# EAGLE board PSU+GainStage (EAGLE 7.6.0)
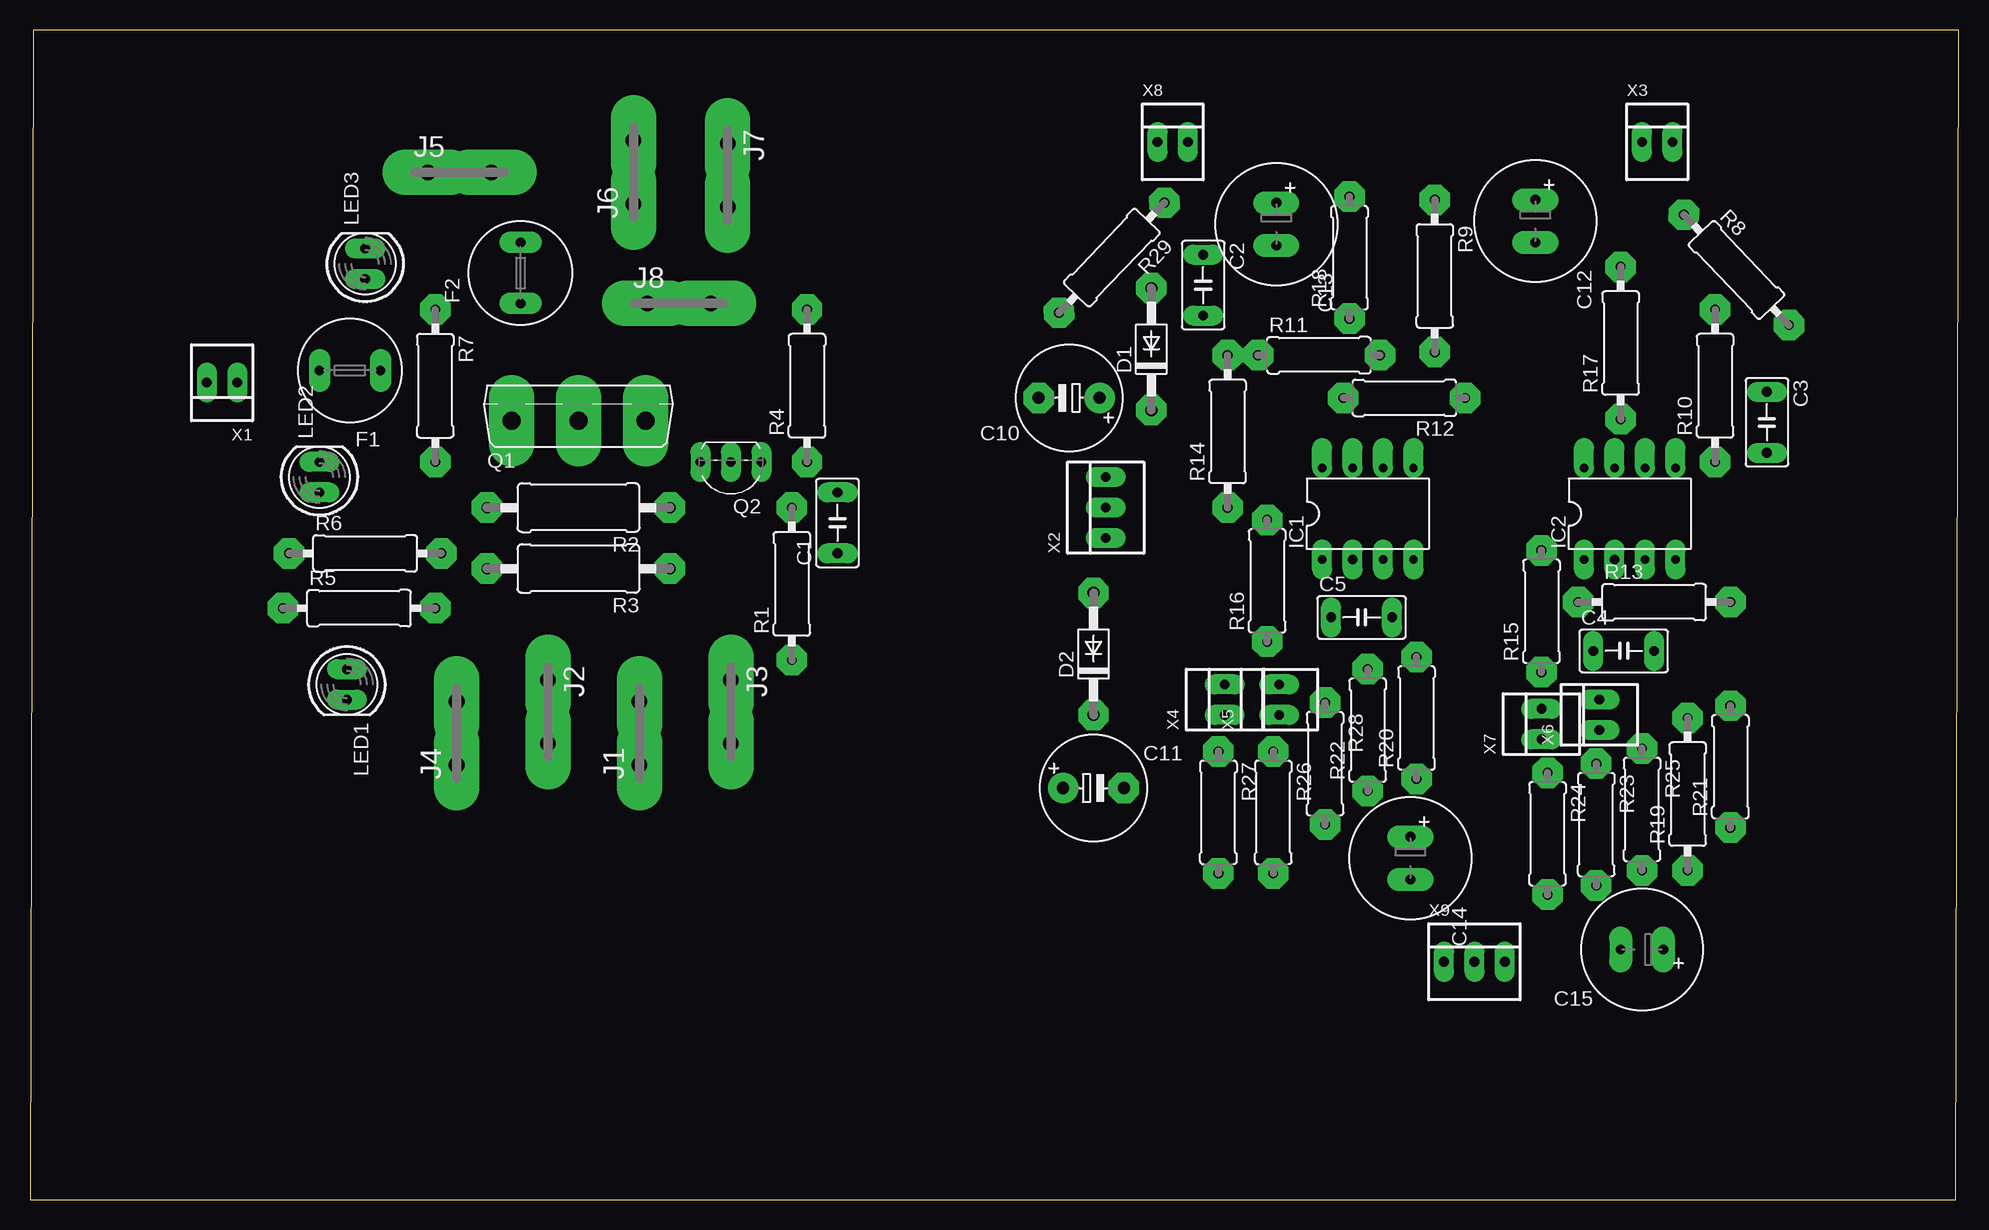
[diagram p0: board, top side]
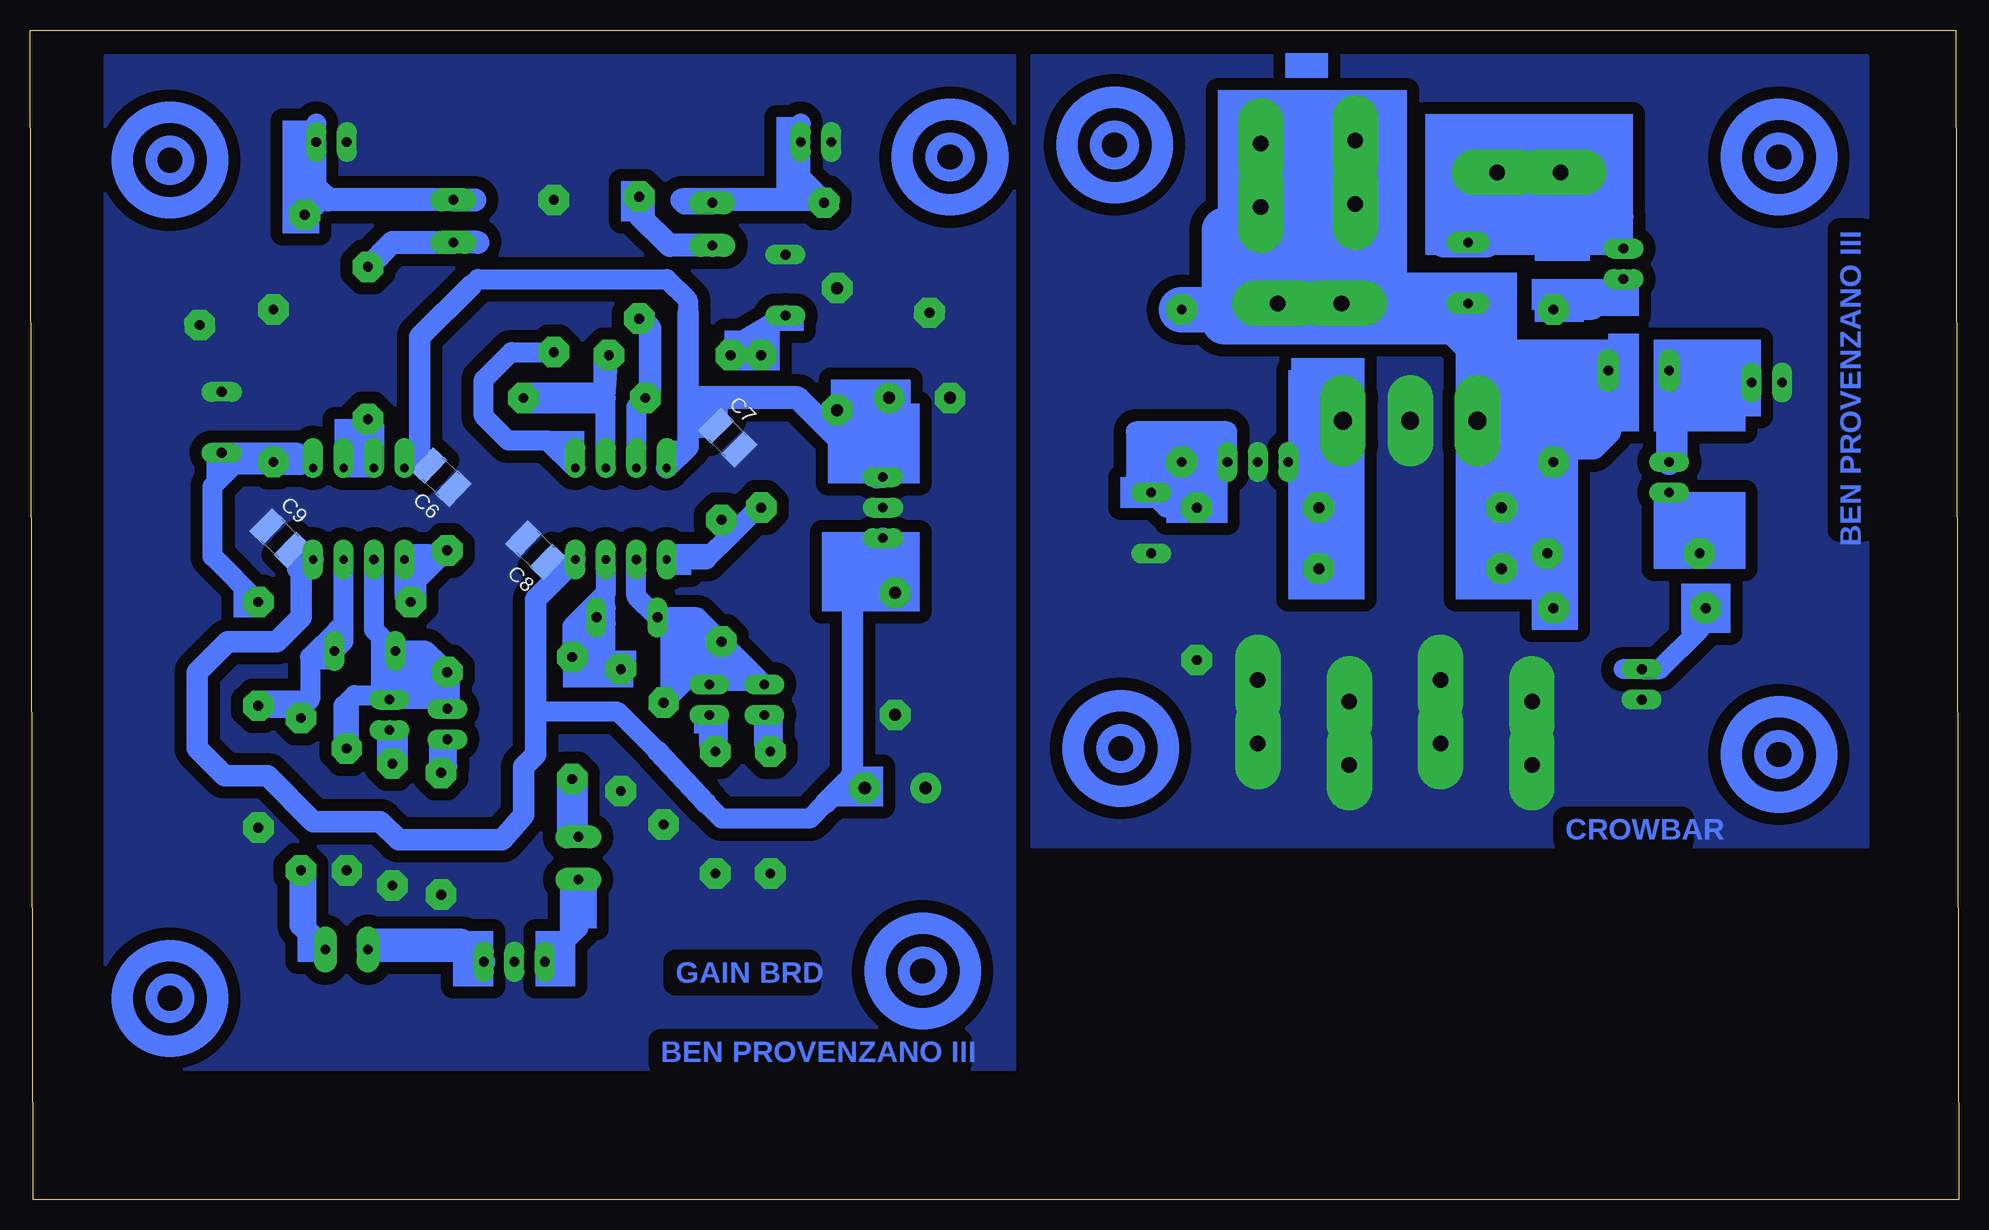
[diagram p1: board, bottom side, seen from below]

Size 160.76 x 97.46 mm. Coordinates in mm from the lower left corner, seen from the top.
Outline: 0,0 160.51,0 160.76,97.46 0.25,97.46 0,0
Copper layers (1*16): Top 0.035mm / dielectric 1.5mm / Bottom 0.035mm
Design rules "default": minimum track width 10mil, minimum drill 24mil, track to track 8mil, track to pad 8mil, pad to pad 8mil, via to via 8mil, smd to smd 8mil, copper to edge 40mil, drill to drill 8mil, minimum pad ring 10mil, minimum via ring 8mil, stop-mask expansion 4mil, vias tented up to drill 0mil, thermal gap 10mil

## Footprints (pad centres in the part's own frame; a part is rotated, then mirrored left to right if it is on the bottom)
C050-035X075 = drill 0.813 pad 1.676 long: 1 -2.54,0; 2 2.54,0
C1210 = smd 1.6 x 2.7: 1 -1.4,0; 2 1.4,0
E5-8,5 = drill 1.016 pad 2.54: + -2.54,0 | drill 1.016 pad 2.54 octagon: - 2.54,0
E3,5-10 = drill 0.813 pad 1.93 long: + -1.778,0; - 1.778,0
DO41-10 = drill 1 pad 2.54 octagon: A 5.08,0; C -5.08,0
TR5 = drill 0.813 pad 1.778 long: 1 -2.54,0; 2 2.54,0
DIL08 = drill 0.7 pad 1.676 long: 1 -3.81,-3.81; 3 1.27,-3.81; 4 3.81,-3.81 | drill 0.8 pad 1.676 long: 2 -1.27,-3.81 | drill 0.7 pad 1.676 offset: 5 3.81,3.81; 6 1.27,3.81; 7 -1.27,3.81; 8 -3.81,3.81
F061.040 = drill 1.3 pad 3.81 long: A1 -2.65,0; A2 2.65,0
LED5MM = drill 0.813 pad 1.676 long: A -1.27,0; K 1.27,0
TO247BV = drill 1.499 pad 3.81 long: D 0,-2.921; G -5.588,-2.921; S 5.588,-2.921
TO92-EBC = drill 0.813 pad 1.676 long: B 0,-1.27; C -2.54,-1.27; E 2.54,-1.27
0309/12 = drill 0.813 pad 2.54 octagon: 1 -6.35,0; 2 6.35,0
0411/15 = drill 0.914 pad 2.54 octagon: 1 -7.62,0; 2 7.62,0
0309/10 = drill 0.813 pad 2.54 octagon: 1 -5.08,0; 2 5.08,0
22-23-2021 = drill 0.8 pad 1.676 long: 1 -1.27,0; 2 1.27,0
22-23-2031 = drill 0.8 pad 1.676 long: 1 -2.54,0; 2 0,0; 3 2.54,0

## Placement (x,y rotation side)
C1  1nF  [C050-035X075]  67.31,56.39 90 top
C2  3300pF  [C050-035X075]  97.79,76.2 270 top
C3  3300pF  [C050-035X075]  144.78,64.77 270 top
C4  220pF  [C050-035X075]  132.84,45.72 0 top
C5  220pF  [C050-035X075]  111,48.51 0 top
C6  100nF  [C1210]  126.49,60.2 136.3 bottom
C7  100nF  [C1210]  102.62,63.5 314.5 bottom
C8  100nF  [C1210]  118.62,54.1 136.3 bottom
C9  100nF  [C1210]  139.95,55.12 315.7 bottom
C10  100uF  [E5-8,5]  86.61,66.8 180 top
C11  100uF  [E5-8,5]  88.65,34.29 0 top
C12  22uF BP  [E3,5-10]  125.48,81.53 270 top
C13  22uF BP  [E3,5-10]  103.89,81.28 270 top
C14  22uF BP  [E3,5-10]  115.06,28.45 270 top
C15  22uF BP  [E3,5-10]  134.37,20.83 180 top
D1  1N4004  [DO41-10]  93.47,70.87 90 top
D2  1N4004  [DO41-10]  88.65,45.47 90 top
F1  1A  [TR5]  26.67,69.09 180 top
F2  5A  [TR5]  40.89,77.22 90 top
IC1  TL072  [DIL08]  111.51,57.15 0 top
IC2  TL072  [DIL08]  133.35,57.15 0 top
J1  [F061.040]  50.8,38.86 90 top
J2  [F061.040]  43.18,40.64 270 top
J3  [F061.040]  58.42,40.64 270 top
J4  [F061.040]  35.56,38.86 90 top
J5  [F061.040]  35.81,85.6 0 top
J6  [F061.040]  50.29,85.6 90 top
J7  [F061.040]  58.17,85.34 270 top
J8  [F061.040]  54.1,74.68 0 top
LED1  BLU  [LED5MM]  26.42,42.93 270 top
LED2  RED  [LED5MM]  24.13,60.2 90 top
LED3  RED  [LED5MM]  27.94,77.98 90 top
Q1  BTA41  [TO247BV]  45.72,67.82 0 top
Q2  TL431  [TO92-EBC]  58.42,60.2 180 top
R1  2k2  [0309/12]  63.5,51.31 90 top
R2  470  [0411/15]  45.72,57.66 180 top
R3  470  [0411/15]  45.72,52.58 180 top
R4  10k  [0309/12]  64.77,67.82 90 top
R5  3k3  [0309/12]  27.43,49.28 0 top
R6  3k3  [0309/12]  27.94,53.85 0 top
R7  3k3  [0309/12]  33.78,67.82 270 top
R8  25k  [0309/12]  142.24,77.47 313.6 top
R9  1k1  [0309/12]  117.09,76.96 270 top
R10  11k5  [0309/12]  140.46,67.82 90 top
R11  11k5  [0309/10]  107.44,70.36 0 top
R12  11k5  [0309/10]  114.55,66.8 180 top
R13  1k1  [0309/12]  135.38,49.78 0 top
R14  1k1  [0309/12]  99.82,64.01 90 top
R15  11k5  [0309/10]  125.98,49.02 90 top
R16  11k5  [0309/10]  103.12,51.56 90 top
R17  220  [0309/12]  132.59,71.37 90 top
R18  220  [0309/10]  109.98,78.49 90 top
R19  1k1  [0309/12]  138.18,33.78 90 top
R20  1k1  [0309/10]  115.57,40.13 90 top
R21  25k  [0309/10]  141.73,36.07 90 top
R22  25k  [0309/10]  111.51,39.12 90 top
R23  11k5  [0309/10]  130.56,31.24 270 top
R24  11k5  [0309/10]  126.49,30.48 270 top
R25  11k5  [0309/10]  134.37,32.51 270 top
R26  11k5  [0309/10]  103.63,32.26 270 top
R27  11k5  [0309/10]  99.06,32.26 270 top
R28  11k5  [0309/10]  107.95,36.32 270 top
R29  25k  [0309/12]  90.17,78.49 226.2 top
X1  1A  [22-23-2021]  16,68.07 180 top
X2  PWR  [22-23-2031]  89.66,57.66 90 top
X3  0 OUT  [22-23-2021]  135.64,88.14 0 top
X4  [22-23-2021]  99.57,41.66 90 top
X5  [22-23-2021]  104.14,41.66 90 top
X6  [22-23-2021]  130.81,40.39 90 top
X7  [22-23-2021]  125.98,39.62 90 top
X8  180 OUT  [22-23-2021]  95.25,88.14 0 top
X9  IN  [22-23-2031]  120.4,19.81 0 top

## Library data of the parts
C1-C15 R1-R29 = resistor
D1 D2 = diode
F1 F2 = fuse; OC_FARNELL: unknown; OC_NEWARK: unknown
IC1 IC2 = linear
J1-J8 = con-faston; OC_FARNELL: unknown; OC_NEWARK: unknown
LED1-LED3 = led
Q1 = transistor-power
Q2 = transistor-npn
X1 X3-X8 = con-molex; MF: MOLEX; MPN: 22-23-2021; OC_FARNELL: 1462926; OC_NEWARK: 25C3832
X2 X9 = con-molex; MF: MOLEX; MPN: 22-23-2031; OC_FARNELL: 1462950; OC_NEWARK: 30C0862

## Nets
AGND: C2.1 C3.1 C6.1 C7.2 C8.2 C9.1 C10.- C11.+ D1.A D2.C R8.2 R9.1 R10.2 R21.1 R22.1 R23.2 R24.2 R25.2 R26.2 R27.2 R28.2 R29.2 X2.2 X3.1 X8.1 X9.2
GND: C1.1 J1.A1 J1.A2 J2.A1 J2.A2 J3.A1 J3.A2 J4.A1 J4.A2 LED1.K Q1.D Q2.B R1.1 X1.2
N$1: Q1.S Q2.E R2.1 R3.1
N$2: F1.1 F2.1 J6.A1 J6.A2 J7.A1 J7.A2 J8.A1 J8.A2 Q1.G R2.2 R3.2 R4.2 R5.2 R6.2 R7.2
N$3: C1.2 Q2.C R1.2 R4.1
N$4: LED3.A R7.1
N$5: F2.2 J5.A1 J5.A2 LED3.K
N$6: LED1.A R5.1
N$7: F1.2 LED2.K X1.1
N$8: LED2.A R6.1
N$9: C12.- R17.2
N$10: C6.2 C7.1 C10.+ D1.C IC1.8 IC2.8 X2.3
N$11: C8.1 C9.2 C11.- D2.A IC1.4 IC2.4 X2.1
N$12: IC2.6 IC2.7 R17.1
N$13: IC1.5 R9.2
N$14: C3.2 IC2.5 R10.1 R13.2
N$15: IC1.6 R11.2 R12.1
N$16: IC1.7 R12.2 R18.1
N$17: C2.2 R11.1 R14.2
N$18: IC2.1 R13.1 R15.2
N$19: IC1.1 R14.1 R16.2
N$20: C4.2 IC2.3 R19.2 R21.2
N$21: C4.1 IC2.2 R15.1 R25.1 X6.2 X7.2
N$22: C5.1 IC1.2 R16.1 R28.1 X4.2 X5.2
N$23: C5.2 IC1.3 R20.2 R22.2
N$24: R26.1 X5.1
N$25: R27.1 X4.1
N$26: R24.1 X7.1
N$27: R23.1 X6.1
N$28: C13.- R18.2
N$29: C12.+ R8.1 X3.2
N$30: C13.+ R29.1 X8.2
N$31: C15.+ R19.1
N$32: C14.+ R20.1
N$33: C14.- X9.1
N$34: C15.- X9.3

## Tracks (layer width: path | path; a pad name or v marks a point on that pad's centre or on a via)
AGND
  pour Bottom (isolate 1.016, no thermals): 78.74,95.25 154.43,95.25 154.43,10.92 78.74,10.92
GND
  pour Bottom (isolate 1.016, no thermals): 7.62,95.25 77.22,95.25 77.22,29.46 7.62,29.46
N$1
  Bottom 1.676: R3.1 R2.1 53.34,61.47 | 53.34,61.47 53.34,62.86 Q1.S | Q2.E 53.34,61.47
N$2
  Bottom 1.016: J6.A1 52.18,84.84 55.12,84.84 54.61,84.33 | 59.69,73.66 58.67,74.68 J8.A2 J8.A1
  Bottom 1.778: F2.1 41.91,73.66 42.93,73.66 42.93,73.15
  Bottom 2.184: 29.21,70.36 F1.1 29.21,64.01 30.48,62.74 34.29,62.74 | 34.29,62.74 37.97,62.74 Q1.G | R7.2 34.29,62.74 | R3.2 R2.2 | R2.2 38.1,58.93 34.29,62.74 | R6.2 36.2,55.75 | 36.2,55.75 R2.2 | R5.2 34.29,51.31 36.83,53.85 36.83,55.12 36.2,55.75
  Bottom 3.81: Q1.G 39.37,65.66 39.37,70.61 41.91,73.15 42.93,73.15 59.69,73.15 | 59.69,73.15 61.21,73.15 61.21,80.77 57.55,81.39 | 57.55,81.39 54.61,84.33 54.25,84.69 J6.A2 | J7.A2 J7.A1 57.55,81.39 | R4.2 60.2,74.17 59.69,73.66 59.69,73.15
N$3
  Bottom 1.676: Q2.C 60.96,64.01 68.58,64.01 68.58,60.2 C1.2 | R1.2 66.04,57.66 C1.2 | C1.2 R4.1
N$4
  Bottom 1.676: R7.1 30.48,74.17 LED3.A
N$5
  Bottom 1.676: LED3.K 27.94,81.9 J5.A1
  Bottom 2.54: 42.93,79.76 F2.2 39.37,79.76 34.29,84.84 34.29,85.85 34.54,85.6 | J5.A2 34.54,85.6 | 34.54,85.6 J5.A1
N$6
  Bottom 1.676: 27.94,44.2 LED1.A 24.89,44.2 21.59,47.5 R5.1
N$7
  Bottom 0.406: X1.1 22.1,68.07 22.1,67.06
  Bottom 2.184: F1.2 22.1,67.06 21.59,66.55 24.13,64.01 LED2.K
N$8
  Bottom 1.676: LED2.A 21.59,56.39 R6.1
N$9
  Bottom 1.93: R17.2 130.56,79.76 C12.- 123.44,79.76
N$10
  Bottom 1.676: 123.95,76.2 123.44,76.71 107.7,76.71 105.92,74.93 105.92,73.91 | C6.2 127.5,61.46 128.27,62.23 IC2.8 | C7.1 105.14,66.04 105.41,66.04 105.66,66.29
  Bottom 1.778: 128.27,62.23 128.27,71.88 123.95,76.2 | 90.17,60.2 X2.3 89.15,60.71 | 89.15,60.71 88.65,61.21 D1.C | 89.66,61.47 89.66,60.71 89.15,60.71 | 105.16,66.8 105.66,66.29 105.92,66.04 | 105.92,66.04 105.92,62.74 IC1.8 | 105.92,66.04 105.92,73.91
  Bottom 1.93: 90.17,60.2 96.77,66.8 105.16,66.8 | C10.+ 90.17,65.79 D1.C 93.98,65.79
N$11
  Bottom 1.676: C8.1 116.59,52.11 116.59,52.07 | 137.67,53.34 138.47,54.14 C9.2 | 108.46,37.34 111.76,40.64 118.62,40.64 | 94.49,33.02 95.76,31.75 103.12,31.75 104.39,33.02
  Bottom 1.778: IC2.4 137.67,53.34 138.43,52.58 138.18,52.32 138.18,48.51 140.21,46.48 144.27,46.48 146.81,43.94 146.81,37.59 144.53,35.31 140.97,35.31 137.16,31.5 131.57,31.5 130.05,29.97 121.41,29.97 119.63,32 119.63,36.07 118.62,37.08 118.62,40.64 118.62,50.04 116.59,52.07 IC1.4 | D2.A 89.66,51.56 X2.1 92.2,52.58 92.2,35.31 92.33,35.18 94.49,33.02 | 104.39,33.02 108.46,37.34
  Bottom 1.93: C11.- 92.08,35.18 92.33,35.18
N$12
  Bottom 1.676: IC2.6 IC2.7 132.08,64.52 R17.1
N$13
  Bottom 1.676: IC1.5 117.6,63.25 120.9,63.25 122.94,65.28 122.94,68.33 120.65,70.61 R9.2
N$14
  Bottom 1.676: IC2.5 138.18,61.98 | 142.75,62.23 138.43,62.23 138.18,61.98 | 142.75,62.23 C3.2 | 138.18,61.98 138.18,61.21 140.21,61.21 R10.1 | R13.2 145.54,53.59 145.54,59.44 142.75,62.23
N$15
  Bottom 1.676: IC1.6 112.78,66.8 | 112.78,66.8 R11.2 | R12.1 112.78,66.8
N$16
  Bottom 1.676: IC1.7 110.24,66.04 R12.2 108.97,67.31 108.97,72.64 109.73,73.41 R18.1
N$17
  Bottom 1.778: 101.6,70.36 101.6,71.37 C2.2 | R14.2 101.6,70.36 | 101.6,70.36 R11.1
N$18
  Bottom 1.676: IC2.1 129.54,50.29 R13.1 129.03,51.05 R15.2
N$19
  Bottom 1.676: IC1.1 104.39,53.34 102.23,55.5 | 102.23,55.5 100.08,57.66 R14.1 | R16.2 102.23,55.75 102.23,55.5
N$20
  Bottom 1.676: C4.2 134.62,46.48 134.62,47.5 | 134.62,47.5 IC2.3 | 134.62,47.5 135.13,47.5 137.41,45.21 137.41,41.66 138.18,40.89 R19.2 | R21.2 141.48,41.4 138.18,41.4
  Bottom 1.778: R19.2 138.18,41.4
N$21
  Bottom 1.676: IC2.2 132.08,47.5 C4.1 128.52,45.72 | R15.1 127.13,45.09 | 127.13,45.09 127.76,45.72 128.52,45.72 | X6.2 130.43,42.04 | 130.43,42.04 128.52,43.94 128.52,45.72 | X7.2 127.51,42.42 127.51,44.7 127.13,45.09 | R25.1 134.62,37.85 134.62,41.15 133.73,42.04 130.43,42.04
N$22
  Bottom 1.676: IC1.2 110.24,50.29 C5.1 105.16,48.51 R16.1 102.74,46.1 | X4.2 102.74,46.1 | R28.1 103.51,45.85 | 103.51,45.85 103.25,46.1 102.74,46.1 | X5.2 103.51,43.56 103.51,45.85
N$23
  Bottom 1.676: C5.2 112.78,49.28 112.78,48.01 | R22.2 112.78,44.7 112.78,48.01 | 112.78,48.01 R20.2 115.57,47.75 112.78,50.55 IC1.3
N$24
  Bottom 1.676: R26.1 104.14,37.85 X5.1
N$25
  Bottom 1.676: R27.1 99.57,37.85 X4.1
N$26
  Bottom 1.676: R24.1 125.98,36.07 X7.1
N$27
  Bottom 1.676: R23.1 130.81,36.58 X6.1
N$28
  Bottom 1.93: C13.- 107.44,79.5 109.98,82.04 R18.2
N$29
  Bottom 1.676: 136.91,89.66 X3.2 136.91,84.33
  Bottom 1.93: 123.7,83.31 C12.+ 135.89,83.31 136.27,83.69 | 136.27,83.69 136.91,84.33 | R8.1 136.27,83.66 136.27,83.69
N$30
  Bottom 1.676: 96.52,85.02 X8.2 96.52,89.66
  Bottom 1.93: R29.1 94.81,83.31 | 94.81,83.31 106.43,83.31 106.17,83.06 C13.+ | 94.81,83.31 96.52,85.02
N$31
  Bottom 1.93: C15.+ 138.18,22.86 R19.1
N$32
  Bottom 1.676: C14.+ 115.57,30.73 R20.1
N$33
  Bottom 1.676: X9.1 115.06,22.61 C14.-
N$34
  Bottom 1.93: X9.3 124.71,21.59 132.33,21.59 132.59,21.34 C15.-
(copper drawn outside any net)
  shapes: Bottom area x153, Bottom circle x16

## Text on the board
Bottom: BEN PROVENZANO III | CROWBAR | GAIN BRD | BEN PROVENZANO III